# Altium PCB uku20710_proc.PcbDoc (part 2 of 3)
Units mm, origin at the board's own origin, x right, y up, seen from the top; angles counter-clockwise.
Board outline 354.7 x 156.7 mm, 4 copper layers (Top Layer, MidLayer1, MidLayer2, Bottom Layer); 269 components, 535 nets, 989 pads, 584 vias.
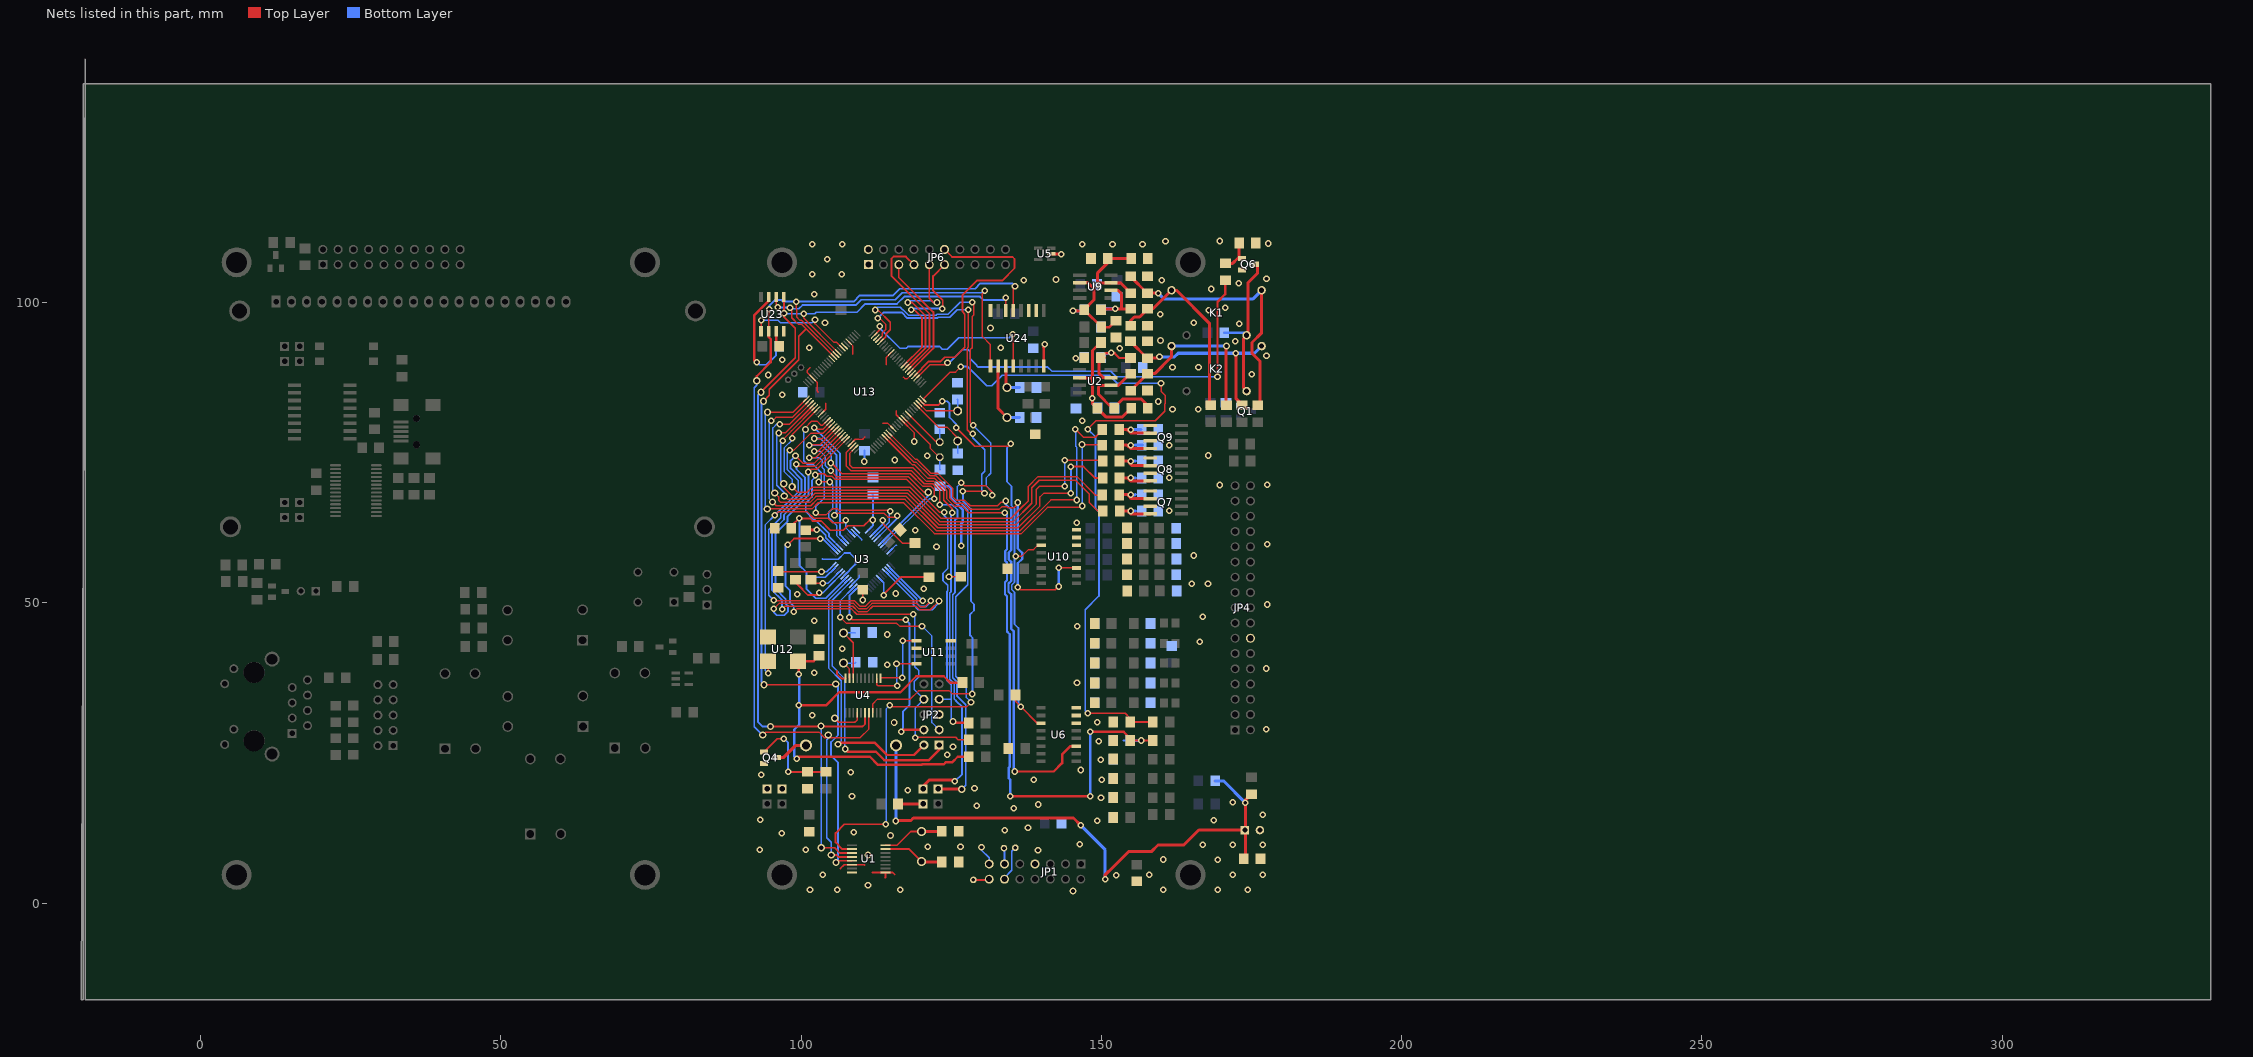
[diagram p2: the nets of this part, all layers, seen from the top]

## Via types
v1: diameter 1.1, hole 0.6, Top Layer to Bottom Layer, 508 vias
v2: diameter 1.2, hole 0.7, Top Layer to Bottom Layer, 56 vias
v3: diameter 1.5, hole 1, Top Layer to Bottom Layer, 16 vias
v4: diameter 1.27, hole 0.711, Top Layer to Bottom Layer, 2 vias
v5: diameter 1.2, hole 0.6, Top Layer to Bottom Layer, 1 vias
v6: diameter 1.1, hole 0.7, Top Layer to Bottom Layer, 1 vias

## Nets (pads, with @x,y where several pads share a name; then routed paths per layer and width w, separated by ;. In a path a pad name is that pad's centre, name@x,y a point inside that pad or via, vN(x,y) a via of type N, cw(c..) or ccw(c..) an arc to the next point about the centre after c; other vN are vias at no path point) (continued)
GND: C1.2 C2.1 C3.2 C4.2 C5.2 C6.2 C7.2 C8.2 C9.2 C10.2 C12.1 C13.2 C14.1 C15.1 C16.1 C17.1 C18.1 C19.1 C20.1 C21.2 C22.1 C23.2 C24.2 C25.1 C26.2 C28.2 C30.2 C31.2 C32.2 C33.2 C34.2 C35.1 C36.1 C37.2 C38.2 C39.2 C40.2 C50.1 C51.1 C52.1 C53.1 C54.1 C55.1 C56.1 C57.1 C58.1 C60.1 C62.1 C63.1 C64.1 C65.1 C66.2 C200.1 C201.1 D3.1 D4.1 D6.1 D7.1 D8.1 D9.1 D10.1 D11.1 D12.1 D13.1 JP1.7 JP2.5 JP4.14 JP6.1 JP6.2 Q1.2 Q4.2 Q6.2 Q7.1 Q7.3 Q8.1 Q8.3 Q9.1 Q9.3 R1.1 R18.2 R19.1 R23.1 R24.2 R26.2 R28.2 R32.2 R34.1 R35.2 R39.1 R40.2 R48.1 R55.1 R59.1 R69.1 R70.1 R74.1 R76.1 R77.1 R78.1 R81.1 R82.1 R117.1 R127.1 U1.6 U1.8 U1.9 U3.15 U3.19 U3.35 U3.36 U3.47 U4.10 U5.2 U6.6 U6.7 U6.8 U10.6 U10.7 U10.8 U11.2 U11.8 U12.2 U13.11 U13.15 U13.31 U13.41 U13.55 U13.72 U13.83 U13.97 U23.4 U24.8 U24.10 U24.11 U24.16 X9.1 X11.1 | length 72.4
  Top Layer w0.25: 101.476,89.15 101.025,88.7 101.025,88.335 102.649,86.712 102.649,85.25 102.849,85.05 ; U13.83@103.327,81.438 104.099,82.21 104.099,83.25 ; U13.55@107.923,93.458 108.55,92.831 108.55,91.372 ; U13.97@108.276,76.488 109.007,77.218 110.25,77.218 110.624,77.592 110.624,77.618 ; C30.2@110.246,52.148 110.279,52.115 v1@110.279,50.448 ; 113.624,79.919 114.391,79.919 U13.11@115.347,78.963 ; 114.201,89.621 114.201,90.898 U13.41@114.994,91.691 ; 115.824,81.969 115.824,81.315 116.616,80.522 U13.15@116.762,80.377 118.853,78.286 118.853,77.518 ; 117.024,87.572 117.324,87.272 117.646,87.272 U13.31@118.529,88.155
  Top Layer w0.3: 105.972,38.659 105.972,38.108 106.671,37.409 U4.10@107.377,37.409 ; 106.527,5.75 107.154,6.377 110.501,6.377 110.528,6.35 ; 111.902,5.077 115.252,5.077 115.579,4.75 ; 113.971,4.2 114.027,4.255 U1.9@114.027,5.077
  Top Layer w0.4: C30.2@110.227,51.547 110.246,51.565 C30.2@110.246,52.148 ; 140.308,92.522 140.358,92.522 140.419,92.461 U24.8@140.419,89.425 U24.8@140.419,89.371
  Top Layer w0.5: U24.10@139.149,98.675 U24.10@139.174,98.7 ; U5.2@141.399,108.1 U5.2@141.633,108.1 v1@142.824,108.1
  Bottom Layer w0.25: 103.628,57.215 106.193,57.215 ; U3.19@107.085,54.447 U3.19@107.142,54.505 ; U3.15@108.499,53.033 109.677,54.211 109.677,54.548 ; U3.35@108.852,61.766 110.102,60.516 110.102,60.449 ; U3.47@114.757,58.584 115.772,59.599 115.879,59.599
  Bottom Layer w0.3: 103.576,57.285 103.612,57.249 ; 106.176,57.249 107.213,58.285 108.115,58.285 109.027,57.373 109.027,56.39 U3.19@107.142,54.505 ; v1@110.557,73.574 C32.2@110.557,75.331
  Bottom Layer w0.4: C35.1@123.118,69.388 124.7,69.388 124.971,69.116 124.971,67.426 126.882,65.515 126.882,63.415 126.682,63.215 v1(126.682,59.464)
  other v1: 145.271,1.999 101.472,2.199 106.027,2.199 116.529,2.199 160.29,2.199 169.371,2.199 174.344,2.199 111.128,2.95 152.438,4.65 103.571,4.7 157.971,4.7 171.843,4.7 176.845,4.7 169.343,7.201 160.271,7.251 111.128,8.001 139.435,8.801 93.123,8.901 100.775,8.901 121.071,9.401 126.532,9.401 166.842,9.701 171.843,9.701 176.871,9.701 146.371,9.801 114.879,11.25 96.774,11.65 108.727,11.752 133.871,12.102 137.771,12.502 149.338,13.702 168.693,13.75 93.173,13.85 176.845,14.703 135.434,15.75 129.271,16.203 139.471,16.403 171.843,16.803 149.938,17.503 108.472,17.803 117.771,18.804 128.871,19.104 150.038,20.504 138.735,20.55 93.374,21.35 108.272,21.754 146.587,22.15 149.888,23.85 124.331,24.705 125.282,26.007 149.588,26.95 177.471,28.956 149.338,30.106 101.826,31.25 145.937,36.65 102.172,38.358 177.445,39.05 114.329,39.709 106.827,42.35 166.392,43.51 114.329,44.71 145.971,46.11 102.172,47.011 166.842,47.661 177.595,49.711 110.252,50.463 99.325,51.45 115.729,51.55 120.43,52.312 165.042,53.15 167.742,53.15 165.392,57.863 122.531,59.314 177.595,59.714 118.98,62.05 145.887,63.315 161.271,65.315 169.693,69.616 177.595,69.65 161.271,70.817 110.502,73.518 115.571,73.767 120.971,74.468 167.771,74.518 161.271,76.218 118.83,76.85 146.837,80.319 161.841,82.22 166.142,82.22 159.49,83.52 96.824,84.65 94.524,87.921 175.044,88.05 161.841,89.221 166.171,89.221 96.824,90.45 145.737,90.75 177.495,91.15 153.039,92.372 101.326,92.45 133.234,92.45 140.585,93.05 172.293,93.522 159.84,93.672 131.533,95.75 172.944,96.45 103.972,96.623 165.371,96.623 159.771,98.074 167.842,98.724 170.643,99.124 102.172,101.374 168.292,102.25 172.844,103.175 137.035,103.675 160.071,103.725 142.436,103.825 177.495,103.975 101.876,104.725 106.772,104.725 104.326,107.226 143.336,108.05 106.827,109.676 146.837,109.676 151.838,109.676 101.826,109.726 156.84,109.726 177.771,109.826 160.671,110.227 169.693,110.25
  other v6: 115.479,30.058
GND_P: 
NetA1_1: A1.1 Q4.3 | length 5.6
  Top Layer w0.5: Q4.3@96.022,24.203 97.023,24.203 99.025,26.205 A1.1@100.775,26.205
NetA1_2: A1.2 C3.1 R16.1 R19.2 R103.1 | length 99.6
  Top Layer w0.5: v1@115.779,13.752 118.28,13.752 118.68,14.152 145.337,14.152 v1(146.537,12.952) ; v1(150.638,3.95) 150.638,4.7 151.238,5.3 ; 151.25,5.289 154.511,8.55 158.313,8.55 159.414,9.651 163.714,9.651 166.213,12.15 173.886,12.15 C3.1@173.974,12.15 ; R19.2@173.674,7.4 173.974,7.7 173.974,12.142 C3.1@173.974,12.15 ; R16.1@174.981,18.138 173.974,17.131 C3.1@173.974,12.15
  Bottom Layer w0.5: v1@115.779,13.752 115.797,13.771 A1.2@115.797,26.244 ; v1(146.537,12.952) 150.638,8.851 v1(150.638,3.95) ; R103.1@168.955,20.349 170.327,20.349 v1(173.971,16.704)
  other v1: 115.779,13.652
NetBT2_1: 
NetBT2_2: 
NetBT700_1: 
NetC2_1: 
NetC2_2: C2.2 U4.8 Y5.2 | length 10.2
  Top Layer w0.25: Y5.2@107.051,44.968 108.677,43.342 U4.8@108.677,37.409
  Bottom Layer w0.25: Y5.2@107.051,44.968 108.958,44.968 C2.2@109.001,45.011
NetC11_1: C11.1 C15.2 R57.2 R62.1 U9.6 | length 16.8
  Top Layer w0.4: R62.1@149.987,95.907 150.018,95.907 150.031,95.907 151.345,95.907 C15.2@152.362,96.924
  Top Layer w0.5: 145.874,98.65 145.874,98.625 145.874,98.6 146.93,98.6 R57.2@147.062,98.732 ; U9.6@146.374,103.3 146.385,103.3 147.774,103.3 148.774,102.3 148.774,100.444 R57.2@147.137,98.807 R57.2@147.062,98.732 ; R62.1@150.124,96 150.031,95.907 150.024,95.9 150.018,95.907 150.002,95.922 147.192,98.732 147.137,98.732 R57.2@147.062,98.732 ; R62.1@150.468,95.907 R62.1@150.487,95.907
  Bottom Layer w0.5: 145.874,98.6 147.074,98.6 C11.1@147.174,98.7
  other v1: 145.261,98.625
NetC11_2: C11.2 R57.1 R61.2 U9.2 | length 11
  Top Layer w0.5: R57.1@150.47,98.64 150.78,98.95 v1(152.274,98.95) 153.374,98.95 ; U9.2@151.585,102.018 152.807,102.018 153.374,101.45 153.374,98.95 ; R61.2@154.881,98.938 154.874,98.95 153.374,98.95
  Bottom Layer w0.6: C11.2@150.477,98.647 150.78,98.95 v1(152.274,98.95) v1@152.324,98.95
NetC12_2: C12.2 K1.3 R60.1 R61.1 | length 32
  Top Layer w0.5: R61.1@154.881,96.138 154.881,97.007 155.474,97.6 156.374,97.6 157.699,98.925 157.774,99 158.64,99 K1.3@161.68,102.04 162.485,102.04 167.968,96.557 R60.1@167.968,82.862
NetC14_2: C14.2 K1.1 R64.1 R65.1 | length 44.4
  Top Layer w0.5: R65.1@154.874,104.35 154.874,104.3 157.574,101.6 157.678,101.6 159.424,101.6 v1(159.474,101.55) ; R64.1@176.374,82.85 176.374,90.25 175.074,91.55 175.074,93.35 176.68,94.956 K1.1@176.68,102.04
  Bottom Layer w0.5: v1(159.474,101.55) 160.474,100.55 175.19,100.55 K1.1@176.68,102.04
NetC21_1: C21.1 C34.1 U3.18 U3.23 U3.37 | length 48.4
  Top Layer w0.3: C21.1@98.376,62.351 C21.1@98.375,62.401 98.376,62.801 v1(99.676,64.101) ; v1@99.702,63.685 99.897,63.88 100.052,64.035 101.487,64.035 101.891,63.631 103.306,63.631 104.852,62.085 107.002,62.085 107.752,62.835 110.452,62.835 111.402,63.785 v1(111.952,63.785)
  Bottom Layer w0.3: v1@99.702,63.685 99.702,56.235 100.902,55.035 100.902,54.235 ; U3.23@105.67,55.861 104.044,54.235 100.902,54.235 ; U3.18@107.438,54.094 104.08,50.735 102.402,50.735 100.902,52.235 100.902,54.235 ; U3.37@111.221,62.119 111.952,62.85 v1(111.952,63.785) 111.952,67.985 C34.1@111.902,68.035
NetC22_1: 
NetC22_2: C22.2 U4.9 Y5.1 | length 5.1
  Top Layer w0.25: Y5.1@107.051,39.968 108.027,38.992 U4.9@108.027,37.409
  Bottom Layer w0.25: Y5.1@107.051,39.968 108.979,39.968 C22.2@109.114,40.103
NetC23_1: C23.1 R65.2 R69.2 U9.3 | length 14.7
  Top Layer w0.5: R65.2@154.874,101.55 154.874,101.6 153.187,103.288 U9.3@151.585,103.288 149.587,103.288 149.374,103.5 149.374,104.95 151.059,106.634 C23.1@151.059,107.324 151.083,107.3 154.874,107.3 R69.2@154.937,107.307
NetC33_1: C33.1 R98.1 R99.1 U12.4 | length 80.1
  Top Layer w0.4: v1(99.275,24.005) 99.619,24.348 111.435,24.348 112.727,23.056 120.08,23.056 120.13,23.106 123.781,23.106 124.131,23.456 125.189,23.456 126.082,24.348 R99.1@127.92,24.348 ; v1(99.625,32.907) 104.126,32.907 106.327,35.108 116.529,35.108 119.172,37.75 123.741,37.75 124.781,36.709 125.632,36.709 ; v1(99.625,38.108) 99.625,40.259 102.076,40.259 C33.1@102.976,41.159 ; 125.632,36.701 R98.1@126.87,36.701
  Bottom Layer w0.4: v1(99.275,24.005) 98.825,24.455 98.825,28.856 99.675,29.706 99.675,38.058 v1(99.625,38.108)
NetC35_2: C35.2 U13.16 Y1.2 | length 11.1
  Top Layer w0.25: U13.16@117.115,80.731 121.524,76.321 121.524,75.7 122.976,74.249 123.074,74.249 Y1.2@123.079,74.249
  Bottom Layer w0.3: Y1.2@123.079,74.249 123.079,74.247 123.079,72.226 C35.2@123.118,72.188 C35.2@123.124,72.194
NetC36_2: C36.2 U13.18 Y1.1 | length 9.3
  Top Layer w0.25: U13.18@117.822,81.438 122.511,76.749 123.074,76.749 Y1.1@123.079,76.749
  Bottom Layer w0.3: Y1.1@123.079,76.749 123.079,78.86 C36.2@123.081,78.862
NetC45_1: 
NetC45_2: 
NetC46_1: 
NetC46_2: 
NetC47_2: 
NetC48_1: 
NetC48_2: 
NetC49_1: 
NetC50_2: C50.2 U24.2 Y4.1 | length 11.3
  Top Layer w0.5: U24.2@132.799,89.425 132.799,82.333 Y4.1@134.274,80.858
  Bottom Layer w0.5: Y4.1@134.274,80.858 136.367,80.858 C50.2@136.387,80.843
NetC51_2: C51.2 U13.23 Y3.1 | length 8.9
  Top Layer w0.25: U13.23@119.59,83.205 120.853,81.942 Y3.1@126.075,81.942
  Bottom Layer w0.3: C51.2@126.021,83.847 126.075,83.794 Y3.1@126.075,81.942
NetC52_2: C52.2 U13.22 Y3.2 | length 11.6
  Top Layer w0.25: U13.22@119.236,82.852 122.838,79.25 124.274,79.25 126.075,77.45 Y3.2@126.075,76.942
  Bottom Layer w0.3: C52.2@126.075,74.9 Y3.2@126.075,76.942
NetC53_2: C53.2 U24.3 Y4.2 | length 5.8
  Top Layer w0.5: U24.3@134.069,89.425 134.069,86.063 Y4.2@134.274,85.858
  Bottom Layer w0.5: Y4.2@134.274,85.858 136.372,85.858 C53.2@136.387,85.843
NetC61_1: C61.1 C64.2 R12.2 R122.1 U2.6 | length 22.8
  Top Layer w0.5: U2.6@146.374,87.45 148.474,87.45 ; C61.1@149.224,82.45 148.474,83.2 v1(148.474,84.05) 148.474,87.45 ; C61.1@149.324,82.4 150.824,80.9 153.43,80.9 R12.2@154.937,82.407 ; R122.1@149.874,93.35 148.524,92 148.524,89.65 148.474,89.6 148.474,87.45
  Bottom Layer w0.5: v1(148.474,84.05) 148.474,83.2 149.224,82.45 149.372,82.45 C64.2@149.374,82.45
NetC61_2: C61.2 R12.1 R121.2 U2.2 | length 18.3
  Top Layer w0.5: R121.2@154.881,88.138 154.762,88.138 152.839,86.215 U2.2@151.574,86.215 149.739,86.215 149.474,85.95 149.474,84.75 151.774,82.45 152.024,82.45 152.074,82.4 152.074,82.403 152.074,82.45 152.077,82.453 153.524,83.9 156.674,83.9 157.674,82.9 157.674,82.407 R12.1@157.674,82.4
NetC62_2: C62.2 K2.3 R13.1 R121.1 | length 30
  Top Layer w0.5: R121.1@154.881,85.338 154.874,85.4 154.881,85.4 154.924,85.4 157.674,88.15 158.874,88.15 161.68,90.956 K2.3@161.68,92.74 ; R13.1@170.768,82.862 170.768,92.693 v1(170.824,92.75)
  Bottom Layer w0.5: K2.3@161.68,92.74 170.814,92.74 v1(170.824,92.75)
NetC63_2: C63.2 K2.1 R124.1 R125.1 | length 33
  Top Layer w0.5: R125.1@154.868,93.562 154.874,93.55 154.874,93.45 157.574,90.75 157.678,90.75 159.474,90.75 v1(159.674,90.95) ; v1(172.374,91.55) 172.374,84.056 R124.1@173.568,82.862
  Bottom Layer w0.5: v1(159.674,90.95) 162.174,90.95 162.774,91.55 v1(172.374,91.55) 175.49,91.55 K2.1@176.68,92.74
NetC66_1: C66.1 R125.2 R127.2 U2.3 | length 12.8
  Top Layer w0.4: R127.2@149.912,90.793 150.642,91.523 151.662,91.523 152.212,91.523 152.973,90.762 R125.2@154.868,90.762
  Top Layer w0.5: R127.2@150.474,90.85 150.474,90.8 150.19,90.516 149.574,89.9 149.574,88.2 150.289,87.485 U2.3@151.574,87.485
  Bottom Layer w0.5: C66.1@149.972,90.853 150.641,91.523 v1@151.612,91.523
  other v1: 151.662,91.623
NetC200_2: C200.2 U1.16 Y2.2 | length 10.4
  Top Layer w0.3: U1.16@114.027,9.627 115.955,9.627 118.237,11.909 Y2.2@120.054,11.909
  Top Layer w0.5: Y2.2@120.054,11.909 123.368,11.909 C200.2@123.418,11.959
NetC201_2: C201.2 U1.15 Y2.1 | length 10.1
  Top Layer w0.3: U1.15@114.027,8.977 117.987,8.977 120.03,6.933 Y2.1@120.013,6.933
  Top Layer w0.5: Y2.1@120.162,6.802 C201.2@123.405,6.802
NetC302_1: 
NetC302_2: 
NetC500_2: 
NetC502_1: 
NetC502_2: 
NetC505_1: 
NetC505_2: 
NetC508_1: 
NetC510_1: 
NetC511_1: 
NetC511_2: 
NetC512_2: 
NetC513_2: 
NetC514_1: 
NetC516_1: 
NetC516_2: 
NetC517_1: 
NetC600_1: 
NetC600_2: 
NetC700_1: 
NetC700_2: 
NetC701_1: 
NetC702_1: 
NetC704_2: 
NetC705_2: 
NetC706_1: 
NetC707_1: 
NetC707_2: 
NetC709_1: 
NetC709_2: 
NetC710_1: 
NetC713_1: 
NetC714_1: 
NetC715_1: 
NetD1_2: D1.2 X18.1 | length 4.3
  Top Layer w0.5: D1.2@116.079,16.553 116.093,16.553 116.145,16.5 X18.1@120.322,16.5
NetD3_1: 
NetD3_2: 
NetD5_1: D5.1 K1.5 K2.5 Q6.3 | length 26.3
  Top Layer w0.5: K2.5@174.18,85.24 173.674,85.745 173.674,94.034 K1.5@174.18,94.54 174.374,94.734 174.374,103.25 176.024,104.9 176.024,106.12 Q6.3@175.768,106.377
  Bottom Layer w0.4: D5.1@170.474,94.95 173.77,94.95 K1.5@174.18,94.54
NetD20_2: 
NetD500_1: 
NetD500_2: 
NetD501_1: 
NetD503_1: 
NetD505_1: 
NetD505_2: 
NetD506_1: 
NetD700_1: 
NetD701_1: 
NetD702_1: 
NetD703_2: 
NetD704_1: 
NetD705_1: 
NetD706_1: 
NetDS1_1: 
NetDS1_2: 
NetFU500_1: 
NetFU700_1: 
NetFU700_2: 
NetJ1_2: 
NetJ1_3: 
NetJ1_4: 
NetJ1_7: 
NetJ301_1: 
NetJ301_2: 
NetJ301_3: 
NetJ301_6: 
NetJ301_10: 
NetJ301_11: 
NetJ600_1: 
NetJP1_9: 
NetJP1_10: 
NetJP2_1: JP2.1 U3.16 | length 47.8
  Top Layer w0.4: v1(107.327,25.65) 107.771,25.206 112.428,25.206 113.829,23.806 121.281,23.806 122.981,25.506 JP2.1@122.981,26.307
  Bottom Layer w0.25: v1(107.327,25.65) 107.227,25.75 107.227,37.409 105.176,39.46 105.176,50.418 U3.16@108.145,53.386
NetJP2_2: JP2.2 U3.17 | length 45.6
  Top Layer w0.4: v1(106.127,26.45) 106.384,26.707 112.228,26.707 114.279,24.656 118.791,24.656 JP2.2@120.441,26.307
  Bottom Layer w0.25: v1(106.127,26.45) 106.677,27 106.677,37.009 104.626,39.06 104.626,50.575 U3.17@107.792,53.74
NetJP2_3: JP2.3 U3.14 | length 38.8
  Top Layer w0.25: v1(106.477,47.612) 107.527,46.562 115.929,46.562 116.379,46.112 v1(120.13,46.112)
  Bottom Layer w0.25: v1(106.477,47.612) 106.477,50.304 U3.14@108.852,52.679 ; v1(120.13,46.112) 121.781,44.461 121.781,30.047 JP2.3@122.981,28.847
NetJP2_4: JP2.4 U3.13 | length 38.2
  Top Layer w0.3: v1(108.027,47.612) 108.477,47.162 v1(117.43,47.162)
  Top Layer w0.4: v1(116.671,28.507) 117.011,28.847 JP2.4@120.441,28.847
  Bottom Layer w0.3: v1(108.027,47.612) 108.027,51.147 U3.13@109.206,52.326 ; v1(116.671,28.507) 116.971,28.807 116.971,31.908 118.03,32.966 118.03,46.562 v1(117.43,47.162)
NetJP2_7: JP2.7 R113.1 U3.28 | length 80.3
  Top Layer w0.25: v1@102.5,71.068 102.9,71.468 103.85,71.468 104.25,71.068 105.15,71.068 105.668,70.55 117.574,70.55 123.074,65.05 v1(123.824,65.05)
  Top Layer w0.4: v2@125.005,30.007 125.012,30.001 R113.1@127.894,30.001
  Bottom Layer w0.3: v1@102.5,71.068 101.8,70.368 101.8,67.617 100.749,66.567 100.749,65.216 102.13,63.835 102.302,63.835 104.652,61.485 104.652,61.016 104.96,60.709 U3.28@106.378,59.291 ; JP2.7@122.981,33.927 124.987,33.927 125.005,33.909 ; v1(123.824,65.05) 123.824,64.5 124.424,63.9 124.424,55.7 123.624,54.9 123.624,53.7 124.424,52.9 124.424,51.984 124.272,51.831 124.272,37.093 125.005,36.359 v2@125.005,30.007
  other v1: 102.35,71.268
  other v2: 125.282,30.208
NetJP2_8: JP2.8 R112.1 U3.26 | length 72.9
  Top Layer w0.25: v1(98.776,48.498) 99.241,48.962 108.401,48.962 109.264,48.1 118.642,48.1 v1(118.68,48.062) ; v1(119.03,27.55) 119.087,27.607 125.732,27.607 126.139,27.2 R112.1@127.894,27.2
  Top Layer w0.3: v1(97.776,59.65) 98.811,60.685 v1(103.152,60.685)
  Bottom Layer w0.25: v1(118.68,48.062) 118.93,47.812 118.93,39.351 119.571,38.71 119.571,37.641 118.83,36.9 118.83,35.538 JP2.8@120.441,33.927 119.03,32.516 v1(119.03,27.55)
  Bottom Layer w0.3: v1@97.376,59.65 97.376,52.799 98.126,52.048 98.126,50.098 98.776,49.448 v1(98.776,48.498) ; v1(103.152,60.685) 103.569,60.685 U3.26@105.67,58.584
NetJP3_3: 
NetJP3_3: 
NetJP5_5: 
NetJP5_6: 
NetJP5_7: 
NetJP5_9: 
NetJP5_10: 
NetJP5_11: 
NetJP5_12: 
NetJP9_1: 
NetJP10_1: 
NetJP10_2: 
NetJP10_3: 
NetJP10_4: 
NetJP10_5: 
NetJP10_6: 
NetQ1_1: Q1.1 R1.2 R84.2 | length 5
  Bottom Layer w0.3: R84.2@168.113,80.468 172.365,80.468 Q1.1@172.868,80.97
NetQ1_1: 
NetQ1_2: 
NetQ4_1: Q4.1 R22.2 R23.2 | length 16.4
  Top Layer w0.3: Q4.1@93.774,25.105 96.024,27.356 v1(97.124,27.356) ; v1(97.825,21.854) 97.825,21.804 97.862,21.842 R22.2@104.133,21.842
  Bottom Layer w0.3: v1(97.124,27.356) 97.825,26.656 v1(97.825,21.854)
NetQ5_2: 
NetQ6_1: Q6.1 R72.2 R74.2 | length 5.4
  Top Layer w0.5: R72.2@170.667,106.526 171.867,106.526 172.666,107.325 Q6.1@173.422,107.325 ; Q6.1@172.924,107.583 172.924,109.884 R74.2@172.924,109.928
NetQ7_2: Q7.2 R31.2 R34.2 | length 6.2
  Top Layer w0.5: R31.2@153.012,67.993 153.019,68 154.324,68 154.499,67.825 154.549,67.775 154.599,67.725 154.984,67.34 Q7.2@158.136,67.34
  Bottom Layer w0.5: v1@154.874,67.95 155.624,67.95 155.637,67.993
  other v1: 154.874,68
NetQ7_4: Q7.4 R38.2 R39.2 | length 6.1
  Top Layer w0.5: R38.2@153.024,65.3 154.324,65.3 154.513,65.111 154.563,65.061 154.613,65.011 154.824,64.8 154.874,64.8 Q7.4@158.136,64.8
  Bottom Layer w0.5: v1(154.874,65.272) 155.547,65.272 155.574,65.3 155.637,65.293
NetQ8_2: Q8.2 R30.2 R77.2 | length 6.2
  Top Layer w0.5: R30.2@153.012,73.593 154.318,73.593 154.324,73.6 154.503,73.422 154.603,73.322 155.089,72.835 Q8.2@158.124,72.835
  Bottom Layer w0.5: v1(154.874,73.593) 155.637,73.593
NetQ8_4: Q8.4 R37.2 R78.2 | length 6.1
  Top Layer w0.5: R37.2@153.012,70.793 154.324,70.793 154.499,70.618 154.549,70.568 154.599,70.518 154.823,70.295 154.874,70.295 Q8.4@158.124,70.295
  Bottom Layer w0.5: v1(154.874,70.793) 155.637,70.793
NetQ9_2: Q9.2 R79.2 R81.2 | length 7.2
  Top Layer w0.5: R79.2@152.962,78.843 154.274,78.843 ; 154.274,78.8 154.274,78.843 ; Q9.2@158.124,78.235 154.939,78.235 154.624,78.55 154.574,78.6 154.524,78.65 154.331,78.843 154.274,78.843
  Bottom Layer w0.5: v1@154.874,78.843 R81.2@156.587,78.843
  other v1: 154.874,78.8
NetQ9_4: Q9.4 R80.2 R82.2 | length 6.7
  Top Layer w0.5: R80.2@152.962,76.243 154.268,76.243 154.274,76.25 154.474,76.05 154.524,76 154.574,75.95 154.829,75.695 154.874,75.695 Q9.4@158.124,75.695
  Bottom Layer w0.5: 155.587,76.243 R82.2@156.687,76.243 R82.2@156.874,76.243
  other v1: 154.874,76.25
NetQ10_1: 
NetQ10_3: 
NetQ10_3: 
NetQ11_1: 
NetQ11_1: 
NetQ11_3: 
NetQ500_1: 
NetQ501_1: 
NetQ600_1: 
NetQ600_3: 
NetQ700_1: 
NetQ700_3: 
NetR3_1: 
NetR3_2: 
NetR3_2: 
NetR3_2: 
NetR3_2: 
NetR3_2: 
NetR3_2: 
NetR3_2: 
NetR4_1: 
NetR4_2: 
NetR5_1: 
NetR5_2: 
NetR6_1: 
NetR6_2: 
NetR7_1: 
NetR7_2: 
NetR7_2: 
NetR8_1: 
NetR8_1: 
NetR8_2: 
NetR8_2: 
NetR20_1: R20.1 U3.7 | length 12.1
  Top Layer w0.3: v1(113.728,51.247) 113.728,51.412 114.677,52.36 115.052,52.735 116.59,54.273 R20.1@121.309,54.273
  Bottom Layer w0.3: U3.7@112.989,54.094 113.737,53.345 113.737,51.406 113.728,51.397 v1(113.728,51.247)
NetR22_2: 
NetR22_2: 
NetR22_2: 
NetR22_2: 
NetR22_2: 
NetR22_2: 
NetR22_2: 
NetR22_2: 
NetR22_2: 
NetR25_1: 
NetR30_2: 
NetR38_1: 
NetR43_1: 
NetR43_2: 
NetR43_2: 
NetR44_2: 
NetR44_2: 
NetR45_2: 
NetR52_1: 
NetR53_1: 
NetR57_1: 
NetR60_1: 
NetR69_2: 
NetR83_1: 
NetR90_2: 
NetR91_1: 
NetR93_1: 
NetR95_1: R95.1 U23.3 | length 2.4
  Top Layer w0.4: R95.1@95.824,92.85 95.859,92.885 U23.3@95.859,95.2
NetR96_2: R96.2 U23.7 | length 17.7
  Top Layer w0.4: v1(92.574,90.05) 92.174,90.45 92.174,97.85 94.589,100.265 U23.7@94.589,100.9
  Bottom Layer w0.3: v1(92.574,90.05) 93.002,89.622 94.197,89.622 95.824,91.25 95.824,92.707 R96.2@95.824,92.8
NetR114_1: R114.1 U3.27 | length 6
  Top Layer w0.5: R114.1@101.652,62.185 101.702,62.135 102.552,62.135 v1(102.602,62.185)
  Bottom Layer w0.3: v1(102.602,62.185) 103.152,62.185 104.102,61.235 104.102,60.859 U3.27@106.024,58.937
NetR115_1: R115.1 U3.21 | length 5.7
  Top Layer w0.3: R115.1@101.659,53.823 102.233,53.249 v1(103.577,53.249)
  Bottom Layer w0.25: v1(103.577,53.249) 104.472,53.249 U3.21@106.378,55.154
NetR116_1: R116.1 U3.20 | length 12.7
  Top Layer w0.25: R116.1@99.059,53.823 99.059,53.479 100.252,52.285
  Top Layer w0.3: R116.1@99.059,53.823 99.059,53.479 99.059,53.366 101.126,51.298 103.027,51.298 103.227,51.298 v1@103.327,51.398
  Bottom Layer w0.25: v1(103.027,51.698) 103.677,51.698 104.666,52.687 104.666,52.735 U3.20@106.731,54.801
NetR117_2: R117.2 U3.24 | length 9.6
  Top Layer w0.25: R117.2@96.196,55.148 v1(103.39,55.148) v1@103.402,55.135
  Bottom Layer w0.25: v1(103.39,55.148) 104.25,55.148 U3.24@105.317,56.215
NetR120_1: R120.1 U3.39 | length 10.6
  Top Layer w0.25: v1@113.702,63.885 113.702,63.085 116.84,59.948 R120.1@118.946,59.948
  Bottom Layer w0.3: U3.39@111.928,61.412 113.702,63.186 v1@113.702,63.885
  other v1: 113.603,63.766
NetR305_2: 
NetR306_2: 
NetR504_1: 
NetR505_2: 
NetR505_2: 
NetR510_1: 
NetR600_1: 
NetR600_2: 
NetR603_1: 
NetR603_2: 
NetR605_2: 
NetR702_2: 
NetR704_2: 
NetR705_1: 
NetS2_1: 
NetU1_1: 
NetU1_4: 
NetU1_5: 
NetU4_1: U4.1 U11.1 | length 12.1
  Top Layer w0.25: U4.1@113.227,37.409 113.328,37.509 v1(116.853,37.509) ; v1(116.903,43.661) 116.908,43.665 U11.1@119.205,43.665
  Bottom Layer w0.25: v1(116.853,37.509) 116.903,37.559 v1(116.903,43.661)
NetU4_2: U4.2 U11.4 | length 11.6
  Top Layer w0.25: U4.2@112.577,37.409 112.577,36.36 112.778,36.158 v1(115.979,36.158) ; v1@115.879,39.855 U11.4@119.205,39.855
  Bottom Layer w0.25: v1(115.879,39.859) 115.879,36.258 v1(115.979,36.158)
NetU5_1: 
NetU8_3: 
NetU8_7: 
NetU8_8: 
NetU11_5: 
NetU14_3: 
NetU14_4: 
NetU14_5: 
NetU14_6: 
NetU14_12: 
NetU14_13: 
NetU14_14: 
NetU15_3: 
NetU15_3: 
NetU15_3: 
NetU15_3: 
NetU15_4: 
NetU15_5: 
NetU15_5: 
NetU15_5: 
NetU15_5: 
NetU15_5: 
NetU15_5: 
NetU15_7: 
NetU15_7: 
NetU15_9: 
NetU15_10: 
NetU15_15: 
NetU16_3: 
NetU16_4: 
NetU16_6: 
NetU19_4: 
NetU21_1: 
NetU21_2: 
NetU503_4: 
NetU600_3: 
NetU700_4: 
NetX1_1: 
NetX2_1: 
NetX3_1: 
NetX4_1: 
NetX13_1: 
NetX15_1: 
NetX16_1: X16.1 X22.1 | length 3.3
  Bottom Layer w0.3: X22.1@130.033,9.301 130.033,8.801 131.321,7.513 X16.1@131.321,6.5
NetX21_1: X21.1 X23.1 | length 2.7
  Bottom Layer w0.3: X23.1@133.771,9.151 133.861,9.062 X21.1@133.861,6.5
NetX23_1: 
NetX24_1: X24.1 X26.1 | length 6
  Bottom Layer w0.3: X24.1@133.861,3.96 133.861,4.227 135.071,5.438 135.071,8.588 X26.1@135.684,9.201
NetX25_1: X25.1 X27.1 | length 2.7
  Top Layer w0.3: X27.1@128.682,3.85 131.211,3.85 X25.1@131.321,3.96
NetX32_1: 
NetX33_1: 
OFF1: 
OFF2: 
P0_0: U1.2 U13.46 | length 153.5
  Top Layer w0.25: v1@112.324,98.6 112.274,98.65 112.274,98.7 112.324,98.65 112.874,98.65 114.824,96.7 114.824,95.45 114.074,94.7 114.074,94.307 U13.46@113.226,93.459 ; v1@114.029,13.102 v1(114.079,13.102) ; v1(114.779,32.957) 115.078,32.658 127.533,32.658 v1(128.282,33.407) ; v1(126.682,70.016) 127.232,69.466 130.783,69.466 131.833,68.416 v1(131.833,67.916) ; v1(128.474,100.05) 128.774,99.75 128.774,97.95 128.474,97.65 128.474,92.45 128.174,92.15 128.174,80 v1(128.624,79.55)
  Top Layer w0.3: U1.2@108.477,8.977 106.851,8.977 105.727,10.101 105.727,11.652 107.177,13.102 v1@114.029,13.102
  Bottom Layer w0.25: v1(114.079,13.102) 114.129,13.152 114.129,32.307 v1(114.779,32.957) ; v1(126.682,70.016) 126.032,69.366 126.032,67.166 127.732,65.465 127.732,53.012 125.732,51.012 125.732,37.758 127.532,35.958 127.532,34.207 128.182,33.557 v1@128.182,33.357 ; v1@128.474,100 v1(128.474,100.05) ; v1(128.624,79.55) 131.574,76.6 131.574,71.55 130.783,70.759 130.783,69.516 131.833,68.466 v1(131.833,67.916)
  Bottom Layer w0.3: v1(112.324,98.75) 112.774,99.2 116.474,99.2 116.844,98.83 116.923,98.83 117.873,97.88 122.476,97.88 122.626,98.03 124.454,98.03 126.474,100.05 v1(128.474,100.05)
P0_1: U4.18 U13.47 | length 111.7
  Top Layer w0.25: U4.18@111.927,31.709 111.928,31.71 111.928,33.157 112.728,33.957 118.179,33.957 119.53,35.309 124.681,35.309 125.183,34.808 v1(128.482,34.808) ; v1(112.724,97.35) 112.874,97.5 112.974,97.5 114.124,96.35 114.124,95.55 113.524,94.95 113.524,94.464 U13.47@112.873,93.812 ; v1(126.932,68.566) 130.233,68.566 v1(130.533,68.266) ; v1(127.824,98.8) 127.824,92.6 127.71,92.485 127.71,92.384 127.674,92.348 127.674,78.8 128.324,78.15 v1@128.624,78.15
  Bottom Layer w0.3: v1(112.724,97.35) 113.724,98.35 116.724,98.35 117.674,97.4 122.674,97.4 122.824,97.55 124.774,97.55 126.024,98.8 v1(127.824,98.8) ; 125.174,97.95 125.224,97.95 ; v1(126.932,68.566) 126.932,66.966 128.282,65.615 128.282,50.261 128.782,49.761 128.782,48.711 128.132,48.061 128.132,44.56 128.532,44.16 128.532,34.858 v1(128.482,34.808) ; v1(128.574,78.15) 128.574,77.476 130.583,75.468 130.583,71.867 130.083,71.367 130.083,68.716 v1(130.533,68.266)
P0_2: 
P0_2: 
P0_2: 
P0_2: 
P0_2: U13.98 X19.1 | length 78.7
  Top Layer w0.25: U13.98@108.63,76.134 107.501,75.006 107.501,72.768 108.301,71.968 118.354,71.968 120.504,69.817 121.897,69.817 123.105,68.609 v1(123.105,66.317)
  Top Layer w0.5: X19.1@122.805,19.005 126.706,19.005 v2(126.756,18.955)
  Bottom Layer w0.3: v1(123.105,66.317) 125.18,66.317 126.056,65.441 126.056,64.166 125.606,63.716 125.606,51.712 125.511,51.618 125.232,51.338 125.232,37.508 125.832,36.908 ; 125.823,36.899 125.965,36.757 125.965,34.449 127.406,33.008 127.406,19.605 v2(126.756,18.955)
P0_3: 
P0_3: 
P0_3: 
P0_3: 
P0_3: 
P0_3: 
P0_3: R92.1 U13.99 X17.1 | length 79.7
  Top Layer w0.25: U13.99@108.983,75.781 108.051,74.849 108.051,72.968 108.551,72.468 118.604,72.468 120.805,70.267 122.056,70.267 123.755,68.567 123.755,67.067 125.156,65.666 v1(125.156,64.966) ; v1(124.624,54.35) 124.637,54.338 R92.1@126.562,54.337 R92.1@126.881,54.338
  Top Layer w0.5: X17.1@120.304,19.005 120.322,19.022 120.322,19.472 121.355,20.505 125.331,20.505 v1(125.582,20.254)
  Bottom Layer w0.3: v1(125.156,64.966) 124.974,64.785 124.974,51.855 124.752,51.632 124.752,37.292 125.485,36.558 125.485,33.979 125.806,33.658 ; v1(125.582,20.254) 126.805,21.477 126.805,32.657 125.854,33.607 ; 125.811,33.664 125.861,33.614
P0_4: R31.1 U13.81 | length 75.7
  Top Layer w0.25: v2(98.499,69.317) 99.399,68.417 100.949,68.417 101.75,69.217 118.154,69.217 123.321,64.05 134.894,64.05 136.575,65.731 137.811,66.967 137.811,69.369 139.459,71.018 145.911,71.018 148.985,67.943 R31.1@150.162,67.943 ; v1(98.499,77.369) 98.499,78.024 U13.81@102.619,82.145
  Bottom Layer w0.25: v2(98.499,69.317) 98.499,70.518 97.148,71.868 97.148,75.769 98.499,77.119 v1(98.499,77.369)
P0_5: R38.1 U13.80 | length 79.5
  Top Layer w0.25: v1(96.948,76.969) 96.948,77.169 97.037,77.258 97.037,77.269 98.374,78.607 U13.80@102.266,82.498 ; v2(97.098,69.817) 97.098,69.217 98.599,67.717 101.049,67.717 102.05,68.717 117.904,68.717 123.171,63.45 135.274,63.45 138.409,66.584 138.409,69.167 139.659,70.418 145.661,70.418 148.011,68.067 148.011,66.667 149.378,65.3 R38.1@150.224,65.3
  Bottom Layer w0.25: v1(96.948,76.969) 96.598,76.619 96.598,70.318 v2(97.098,69.817)
P0_6: R30.1 U13.79 | length 82.9
  Top Layer w0.25: v1(96.298,78.27) 97.365,78.27 U13.79@101.912,82.817 ; v2(97.198,67.767) 97.749,67.217 101.249,67.217 102.25,68.217 117.754,68.217 123.001,62.97 135.694,62.97 139.109,66.385 139.109,68.817 139.709,69.417 v1(143.91,69.417) ; v1(143.924,73.7) 150.105,73.7 R30.1@150.212,73.593
  Bottom Layer w0.25: v1(96.298,78.27) 95.948,77.92 95.948,69.567 97.198,68.317 v2(97.198,67.767) ; v1@143.924,69.417 v1(143.924,73.7)
  Bottom Layer w0.3: v1(143.91,69.417) v1@143.91,69.453
P0_7: R37.1 U13.78 | length 85.6
  Top Layer w0.25: v2(95.598,68.267) 96.248,67.617 96.248,67.067 96.598,66.717 101.45,66.717 102.45,67.717 117.504,67.717 122.731,62.49 136.114,62.49 139.759,66.135 139.759,67.617 140.359,68.217 v1(144.91,68.217) ; v1(96.448,79.72) 98.073,79.72 U13.78@101.559,83.205
  Top Layer w0.3: v1(144.91,72.668) 147.011,72.668 148.886,70.793 R37.1@150.212,70.793
  Bottom Layer w0.25: v2(95.598,68.267) 95.298,68.567 95.298,79.12 95.898,79.72 v1(96.448,79.72)
  Bottom Layer w0.3: v1@144.86,68.217 v1(144.91,68.217) v1(144.91,72.668)
P0_8: 
P0_8: 
P0_8: 
P0_8: 
P0_8: 
P0_8: 
P0_8: 
P0_8: 
P0_8: 
P0_8: 
P0_8: 
P0_8: 
P0_8: R79.1 U13.77 | length 94.6
  Top Layer w0.25: v1(94.998,80.32) 95.248,80.32 95.798,80.87 98.517,80.87 U13.77@101.205,83.559 ; v2(95.248,66.767) 95.848,66.167 101.6,66.167 102.65,67.217 117.304,67.217 122.51,62.01 136.477,62.01 141.584,67.117 v1(145.911,67.117) ; v1(145.674,78.9) 147.005,77.569 148.962,77.569 150.162,78.77 R79.1@150.162,78.843 ; R79.1@150.162,78.85 R79.1@150.174,78.85
  Bottom Layer w0.25: v1(94.998,80.32) 94.648,79.97 94.648,67.367 v2(95.248,66.767) ; v1(145.674,78.9) 145.724,78.85 145.724,76.05 145.924,75.85 v1@145.924,67.117
P0_8_: 
P0_8_: 
P0_8_: 
P0_9: R80.1 U13.76 | length 94.2
  Top Layer w0.25: v2(94.348,65.616) 101.8,65.616 102.85,66.667 117.053,66.667 122.19,61.53 136.676,61.53 141.012,65.866 146.561,65.866 v1(146.811,66.117) ; v2(94.398,81.72) 98.66,81.72 U13.76@100.852,83.913 ; v1(146.774,76.35) R80.1@150.055,76.35
  Bottom Layer w0.25: v2(94.348,65.616) 94.048,65.916 94.048,81.37 v2(94.398,81.72) ; v1(146.774,76.35) 146.824,76.3 v1@146.824,66.117
P0_9_: 
P0_9_: 
P0_9_: 
P0_9_: 
P0_10: U13.48
P0_11: U13.49 U24.4 | length 32.5
  Top Layer w0.25: U13.49@112.165,94.519 113.102,95.456 v1(113.102,96.024) ; v1(135.258,94.724) 135.324,94.724 135.339,94.708 U24.4@135.339,89.425
  Bottom Layer w0.3: v1(113.102,96.024) 113.102,95.724 116.453,92.373 117.504,92.373 117.804,92.673 123.055,92.673 123.505,92.223 124.355,92.223 126.256,94.124 134.658,94.124 v1(135.258,94.724)
P0_13: 
P0_15: U1.5 U4.14 U13.62 U23.6 U24.1 | length 176.8
  Top Layer w0.25: U23.6@95.859,100.9 95.859,99.69 96.248,99.301 v1@96.248,98.95 ; v1(98.149,99.15) 98.424,98.874 98.424,97.47 99.544,96.35 100.082,96.35 U13.62@105.448,90.984 ; v1(130.557,101.926) 130.174,101.543 130.174,94.323 131.529,92.968 U24.1@131.529,89.425
  Top Layer w0.3: v2(93.748,83.571) 94.698,84.521 94.698,85.571 99.599,90.473 99.599,94.377 100.827,95.605 ; v2(93.798,36.359) 105.651,36.359 v2(105.751,36.459) ; v2(105.601,30.758) 106.251,30.107 108.951,30.107 109.327,30.483 U4.14@109.327,31.709 ; v2@105.835,6.717 v2(105.801,6.752) 106.076,7.027 U1.5@108.477,7.027
  Bottom Layer w0.3: v2(93.748,83.571) 93.398,83.221 93.397,36.759 v2(93.798,36.359) ; v1@96.248,98.95 96.448,99.15 98.424,99.15 98.624,98.95 99.599,98.95 100.224,99.575 109.101,99.575 110.002,100.475 115.653,100.475 116.803,101.625 130.257,101.625 v1(130.557,101.926) ; v2(105.601,30.758) 105.651,30.708 v2@106.151,30.708 ; v2(105.751,36.459) 106.151,36.059 106.151,27.981 104.976,26.807 104.976,24.556 106.151,23.382 106.151,7.102 v2(105.801,6.752)
  other v1: 96.124,99.224
P0_16: U13.63
P0_17: U1.4 U4.17 U13.61 U23.2 U24.13 | length 177.5
  Top Layer w0.25: v2(93.598,27.957) 94.098,28.457 102.95,28.457 103.85,27.557 109.852,27.557 111.277,28.982 U4.17@111.277,31.709 ; U23.2@94.589,95.2 94.589,98.766 v1(94.698,98.875) ; v1(99.199,100.15) 99.224,97.624 99.824,97.024 100.114,97.024 U13.61@105.801,91.337 ; U24.13@135.339,98.675 135.339,102.457 v1(135.608,102.726)
  Top Layer w0.3: v2(105,8.002) 105.876,8.002 106.201,7.677 U1.4@108.477,7.677
  Top Layer w0.4: v2(92.597,86.972) 92.597,87.722 94.948,90.073 94.948,93.924 94.589,94.282 U23.2@94.589,95.2 ; v2(105,8.002) v2@105.016,7.987
  Bottom Layer w0.3: 92.197,40.86 92.197,85.822 92.597,86.222 v2(92.597,86.972) ; 92.197,41.01 92.197,29.357 v2(93.598,27.957) ; v1(94.698,98.875) 94.698,99.448 95.674,100.424 96.674,100.424 96.949,100.15 108.751,100.15 109.777,101.175 115.303,101.175 116.403,102.276 128.956,102.276 129.857,103.176 135.158,103.176 v1(135.608,102.726) ; v1@99.175,100.124 99.175,100.126 v1(99.199,100.15) ; v2@104.626,27.557 104.276,27.207 104.276,10.853 105,10.129 v2(105,8.002)
  other v2: 104.526,27.957
P0_18: U1.3 U4.16 U13.60 U23.5 U24.14 | length 169.8
  Top Layer w0.25: v1(100.399,98.125) 100.399,97.446 U13.60@106.155,91.691
  Top Layer w0.3: v2(93.297,85.071) 98.999,90.773 98.999,95.724 97.129,97.593 U23.5@97.129,100.9 ; v2(94.898,29.407) 110.252,29.407 110.627,29.782 U4.16@110.627,31.709 ; v1@97.124,98.225 v1@97.129,98.23 ; v2@103.405,9.257 v2(103.35,9.202) 105.576,9.202 106.451,8.327 U1.3@108.477,8.327 ; U24.14@134.058,98.675 v1@134.058,100.975
  Bottom Layer w0.3: 92.797,84.571 v2(93.297,85.071) ; 92.797,84.571 92.797,30.157 93.548,29.407 v2(94.898,29.407) ; v1@97.124,98.225 97.224,98.125 102.25,98.125 102.5,98.375 109.301,98.375 110.702,99.775 115.953,99.775 117.153,100.975 129.757,100.975 130.307,100.425 133.708,100.425 v1(134.058,100.775) ; v2(103.3,29.457) 103.35,29.407 v2(103.35,9.202)
  other v1: 97.149,98.2
P0_19: U13.59
P0_19: 
P0_20: U13.58 U23.1 | length 18.1
  Top Layer w0.25: U23.1@93.319,95.2 93.319,96.996 v1(93.347,97.024) ; v1(102.3,97.124) 102.3,96.501 105.451,93.35 105.91,93.35 U13.58@106.862,92.398
  Bottom Layer w0.25: v1(93.347,97.024) 93.398,97.074 96.098,97.074 96.548,96.624 101.8,96.624 v1(102.3,97.124)
P0_21: U13.57
P0_23: U6.3 U13.9 | length 85
  Top Layer w0.25: U13.9@114.64,78.256 119.03,73.866 119.315,73.866 121.583,71.598 122.727,71.598 125.224,69.1 125.224,67.7 125.874,67.05 127.274,67.05 128.174,66.15 132.674,66.15 133.224,66.7 v1@134.274,66.7
  Top Layer w0.4: v1(135.574,21.9) 142.06,21.9 143.46,23.3 143.46,24.756 144.842,26.138 U6.3@145.804,26.138
  Bottom Layer w0.4: v1@134.024,66.95 v1(134.074,66.95) 134.074,66.4 134.974,65.5 134.974,58.781 134.558,58.365 134.558,57.214 134.974,56.798 134.974,53.629 134.528,53.183 134.528,51.843 134.974,51.396 134.974,45.65 135.424,45.2 135.424,22.05 v1(135.574,21.9)
P0_24: U10.3 U13.8 | length 55.7
  Top Layer w0.25: U13.8@114.287,77.902 118.212,73.977 ; 118.204,73.969 118.737,73.436 119.137,73.436 121.405,71.168 122.407,71.168 124.724,68.85 124.724,67.5 125.674,66.55 127.024,66.55 127.974,65.6 133.024,65.6 133.424,66 134.274,66 134.424,65.85 135.474,65.85 v1@135.974,66.35 ; v1(142.91,55.814) 142.929,55.795 U10.3@145.849,55.795
  Top Layer w0.3: v1(136.058,52.563) 136.458,52.163 142.324,52.163 v1(142.874,52.713)
  Bottom Layer w0.4: v1@135.974,66.35 136.074,66.25 136.074,59.049 136.808,58.315 136.808,57.314 136.074,56.58 v1@136.074,52.563 ; v1(142.874,52.713) 142.874,55.778 v1(142.91,55.814)
  other v1: 136.074,66.7
P0_25: 
P0_25: 
P0_25: 
P0_25: 
P0_25: 
P0_25: 
P0_25: 
P0_25: 
P0_25: 
P0_25: 
P0_25: C28.1 R40.1 R41.1 U13.7 | length 112.3
  Top Layer w0.25: U13.7@113.933,77.549 118.008,73.474 118.476,73.006 118.819,73.006 121.128,70.697 122.234,70.697 122.283,70.648 124.185,68.745 124.185,68.689 124.274,68.6 124.274,67.3 125.474,66.1 126.774,66.1 127.874,65 v1(133.924,65)
  Top Layer w0.4: v1(134.824,17.75) v1(148.124,17.75) ; v1(148.124,28.5) 153.72,28.5 154.975,27.245 155.163,27.057 v1(156.663,27.057) 158.549,27.057 R41.1@158.562,27.043
  Bottom Layer w0.3: 153.672,27.053 C28.1@154.772,27.053
  Bottom Layer w0.4: v1@133.924,64.95 134.274,64.6 134.274,58.901 133.978,58.605 133.978,56.974 134.274,56.678 134.274,53.749 133.948,53.423 133.948,51.423 134.274,51.096 134.274,45.2 134.724,44.75 134.724,22.65 134.574,22.5 134.574,20.8 134.824,20.55 v1(134.824,17.75) ; v1(148.124,17.75) v1(148.124,28.5) ; C28.1@154.772,27.053 156.66,27.053 v1(156.663,27.057)
P0_27: 
P0_27: 
P0_27: 
P0_27: 
P0_27: 
P0_27: 
P0_27: 
P0_27: 
P0_27: 
P0_27: 
P0_27: 
P0_27: 
P0_27: D11.2 R71.1 U13.25 | length 125.1
  Top Layer w0.25: U13.25@120.297,83.913 120.346,83.913 124.806,88.372 124.806,88.421 125.704,88.421 v1(126.605,89.321) ; v1(147.711,78.92) 149.112,80.32 153.163,80.32 ; v1(147.724,31.6) 153.971,31.6 154.763,30.808 154.763,30.257 154.82,30.2 154.877,30.143 R71.1@158.562,30.143 158.564,30.145 R71.1@158.564,30.157 ; 153.163,80.3 158.974,80.3 160.563,81.889 160.563,83.12 ; D11.2@154.324,30.05 D11.2@154.779,30.05 ; v1(159.924,86.55) 159.924,85.211 160.664,84.471 160.664,83.221 160.563,83.12 ; 160.563,83.17 160.563,83.12
  Bottom Layer w0.3: v1(126.605,89.321) 127.753,89.321 130.924,86.15 131.757,86.15 ; 131.774,86.15 131.757,86.15 ; v1(147.711,78.92) 149.024,77.607 149.024,65.7 149.574,65.15 149.574,51.126 147.311,48.862 147.311,32.013 v1(147.724,31.6) ; v1(159.924,86.55) 152.634,86.55 151.312,87.872 133.479,87.872 131.757,86.15
P0_28: R10.1 U6.11 U10.11 U13.24 | length 77.5
  Top Layer w0.25: v1(135.724,57.764) 136.758,57.764 137.859,58.865 138.709,58.865 139.459,59.615 U10.11@139.959,59.615 ; R10.1@135.784,34.708 135.758,33.508 v1(136.558,32.708) 139.319,29.948 U6.11@139.954,29.948
  Top Layer w0.3: U13.24@119.944,83.559 120.553,82.95 122.924,82.95 v1(123.524,83.55) ; v1(125.824,79.15) 128.924,76.05 ; 128.906,76.069 134.506,76.069 ; 134.524,76.05 v1(134.924,76.45)
  Bottom Layer w0.3: v1(123.524,83.55) 124.324,83.55 124.724,83.15 124.724,80.85 125.824,79.75 v1(125.824,79.15) ; v1(134.924,76.45) 134.274,75.8 134.274,70.15 135.024,69.4 135.024,66.2 135.524,65.7 135.524,53.43 135.058,52.963 135.058,52.213 135.524,51.747 135.524,46.45 136.174,45.8 v1@136.174,32.708
P0_29: R72.1 U13.29 | length 71.2
  Top Layer w0.25: U13.29@119.237,87.448 121.438,89.65 124.074,89.65 v1(124.374,89.95)
  Top Layer w0.4: v1(169.324,87.65) 169.324,100.1 170.617,101.393 170.617,103.726 R72.1@170.617,103.75
  Bottom Layer w0.3: v1(124.374,89.95) 124.633,89.95 126.805,92.122 127.855,92.122 128.155,91.822 128.155,90.619 128.992,89.783 129.524,89.25 141.074,89.25 141.774,88.55 151.574,88.55 152.474,87.65 v1(169.324,87.65)
P0_30: JP6.12 U13.30 | length 43.6
  Top Layer w0.3: U13.30@118.883,87.802 121.281,90.2 123.232,90.2 123.904,90.872 125.554,90.872 127.255,92.572 127.255,98.074 126.874,98.454 126.874,101.3 129.224,103.65 133.474,103.65 135.524,105.7 135.524,107.25 135.174,107.6 125.114,107.6 JP6.12@123.874,108.84
P1_0: U3.3 U13.95 | length 76.5
  Top Layer w0.25: v1(95.425,48.998) 96.313,49.885 108.733,49.885 109.651,48.968 110.857,48.968 111.775,49.885 119.302,49.885 119.852,49.335 120.602,49.335 v1(121.602,50.335) ; v1@101.199,71.768 101.682,72.25 102.624,72.25 U13.95@107.569,77.195
  Bottom Layer w0.3: 95.425,48.435 95.948,47.912 97.198,47.912 97.799,48.512 97.799,49.462 97.449,49.812 97.449,50.613 95.748,52.313 95.748,61.565 97.749,63.566 97.749,64.416 101.199,67.867 101.199,71.718 v1(101.149,71.768) ; U3.3@114.403,55.508 119.252,50.659 119.252,49.885 119.752,49.385 120.802,49.385 121.602,50.185 v1(121.602,50.335)
P1_1: U3.4 U13.94 | length 78.8
  Top Layer w0.25: v1(96.825,48.948) 97.313,49.435 108.575,49.435 109.472,48.538 111.035,48.538 111.933,49.435 119.102,49.435 119.702,48.835 121.502,48.835 v1(122.952,50.285) ; v1(99.199,73.068) 99.517,72.75 102.452,72.75 U13.94@107.216,77.513
  Bottom Layer w0.3: v1@97.025,49.148 v1(96.825,48.948) 96.825,50.436 95.148,52.113 95.148,61.865 97.148,63.866 97.148,64.666 100.649,68.167 100.649,70.818 99.199,72.268 v1(99.199,73.068) ; U3.4@114.05,55.154 118.702,50.502 118.702,49.635 119.502,48.835 121.802,48.835 122.952,49.985 v1(122.952,50.285)
P1_4: U3.2 U13.93 | length 71.4
  Top Layer w0.25: v1@95.425,50.348 108.378,50.341 ; v1(99.049,74.469) 100.268,73.25 102.21,73.25 U13.93@106.862,77.902 ; 108.378,50.348 108.878,50.348 109.829,49.398 110.679,49.398 111.629,50.348 112.029,50.348 ; 112.029,50.34 v1(120.252,50.335)
  Bottom Layer w0.3: v1(95.425,50.448) 94.598,51.275 94.598,62.166 96.598,64.166 96.598,64.866 100.049,68.317 100.049,70.568 98.249,72.368 98.249,73.668 v1(99.049,74.469) ; U3.2@114.757,55.861 120.252,50.366 v1(120.252,50.335)
P1_8: U3.40 U13.92 | length 36.8
  Top Layer w0.25: v1(101.374,74.15) 102.403,74.15 U13.92@106.509,78.256 ; v1(102.45,64.966) 102.8,64.616 104.15,64.616 105.15,65.616 106.07,65.616 106.251,65.435 v1@114.653,65.435
  Bottom Layer w0.25: v1(101.374,74.15) 103.018,74.15 103.5,73.668 103.5,72.518 103.85,72.168 103.85,67.467 102.45,66.067 v1(102.45,64.966) ; U3.40@112.282,61.059 114.653,63.43 v1@114.653,65.435
  other v1: 114.853,65.216
P1_9: U3.43 U13.91 | length 39.7
  Top Layer w0.25: v1(102.174,75.2) 102.746,75.2 U13.91@106.155,78.609 ; v1@104.95,71.918 105.868,71 117.871,71 120.454,68.417 v2(121.155,68.417)
  Bottom Layer w0.25: v1(102.174,75.2) 103.219,75.2 104.05,74.369 104.05,72.818 v1@104.95,71.918 ; U3.43@113.343,59.998 113.422,60.078 121.155,67.81 v2(121.155,68.417)
  other v1: 104.95,71.968
P1_10: U3.44 U13.90 | length 43.4
  Top Layer w0.25: v1(101.374,76.25) 101.474,76.35 103.189,76.35 U13.90@105.801,78.963 ; v1@105,73.318 106.819,71.5 118.174,71.5 120.307,69.367 121.655,69.367 122.174,68.848 v1(122.174,67.3)
  Bottom Layer w0.25: U3.44@113.817,59.766 121.352,67.3 v1(122.174,67.3)
  Bottom Layer w0.3: v1(101.374,76.25) 103.469,76.25 105,74.719 v1@105,73.318 ; U3.44@113.696,59.644 U3.44@113.817,59.766
  other v1: 104.95,73.268
P1_14: U3.41 U13.89 | length 35.1
  Top Layer w0.25: v1(102.174,77.35) 103.482,77.35 U13.89@105.448,79.316 ; v1(105.551,64.566) 105.851,64.866 113.853,64.866 114.453,64.266 115.653,64.266 v1@115.903,64.516
  Bottom Layer w0.25: U3.41@112.635,60.705 115.903,63.973 v1@115.903,64.516
  Bottom Layer w0.3: v1(102.174,77.35) 103.169,77.35 105.874,74.645 105.874,64.89 v1(105.551,64.566)
  other v1: 116.003,64.516
P1_15: U3.34 U12.3 U13.88 | length 67.1
  Top Layer w0.25: U12.3@94.474,40.259 94.498,40.236 v1(94.498,38.26) ; v1(95.598,64.566) 96.148,65.116 101.049,65.116 102.08,64.086 104.48,64.086 105.251,63.316 107.001,63.316 v1(107.451,63.766) ; v1(98.099,75.419) 98.793,75.419 101.624,78.25 103.674,78.25 U13.88@105.094,79.67
  Bottom Layer w0.25: v1(94.498,38.26) 93.998,38.76 93.998,62.966 v1(95.598,64.566) 99.499,68.467 99.499,70.368 97.699,72.168 97.699,75.019 v1(98.099,75.419) ; v1(107.451,63.766) 107.451,62.46 U3.34@108.499,61.412
P1_16: U3.31 U13.87 | length 24.2
  Top Layer w0.25: v1(102.174,79.15) 102.424,78.9 103.617,78.9 U13.87@104.741,80.023
  Bottom Layer w0.3: v1(102.174,79.15) 106.474,74.85 106.474,61.292 U3.31@107.501,60.265
P1_17: U3.30 U13.86 | length 29
  Top Layer w0.25: v1(100.724,78.85) 100.724,79.2 101.774,80.25 102.624,80.25 103.324,79.55 103.56,79.55 U13.86@104.387,80.377 ; v1(102.95,70.118) v1(104.75,70.118)
  Bottom Layer w0.25: v1@104.95,69.917 105.251,69.617 105.251,65.716 104.6,65.066 104.6,64.216 105.901,62.916 105.901,61.182 U3.30@107.085,59.998
  Bottom Layer w0.3: v1(100.724,78.85) 100.424,78.55 100.424,73.643 101.099,72.968 102.05,72.968 103.35,71.668 103.35,70.518 v1(102.95,70.118)
P1_18: JP6.5 U13.32 | length 21.8
  Top Layer w0.3: JP6.5@116.254,106.3 116.254,104.17 122.024,98.4 122.024,92.357 U13.32@118.176,88.509
P1_19: JP6.7 U13.33 | length 27
  Top Layer w0.3: U13.33@117.822,88.862 121.374,92.414 121.374,98.1 115.024,104.45 115.024,107.3 115.374,107.65 117.444,107.65 JP6.7@118.794,106.3
P1_20: JP6.9 U13.34 | length 25.5
  Top Layer w0.3: U13.34@117.469,89.216 120.724,92.472 120.724,97.75 118.474,100 v1@117.924,100 ; JP6.9@121.334,106.3 121.334,100.74 122.349,99.725 v1@122.374,99.7
  Bottom Layer w0.3: v1@117.924,100 118.224,100.3 121.774,100.3 122.349,99.725 v1@122.374,99.7
  other v1: 117.724,100 122.624,100
P1_21: 
P1_21: JP6.11 U13.35 | length 25.7
  Top Layer w0.25: v1@118.324,98.75 118.874,98.75 119.174,98.45
  Top Layer w0.3: U13.35@117.115,89.569 120.124,92.579 120.124,97.5 119.174,98.45 ; v1@123.574,98.85 123.574,98.95 123.574,100.35 121.974,101.95 121.974,104.4 JP6.11@123.874,106.3
  Bottom Layer w0.3: v1@118.324,98.75 118.349,98.775 118.574,99 123.424,99 123.499,98.925 v1@123.524,98.9
  other v1: 118.324,98.8 123.524,98.95
P1_22: JP6.13 U13.36 | length 27.2
  Top Layer w0.25: v1@118.024,96.6 118.924,96.6 119.474,96.05 119.474,92.636 ; v1(123.524,96.55) 124.024,96.55 124.474,97 124.474,97.95
  Top Layer w0.3: U13.36@116.762,89.923 119.474,92.636 ; 124.474,97.95 124.474,100.35 122.974,101.85 122.974,103.2 126.074,106.3 JP6.13@126.414,106.3
  Bottom Layer w0.3: v1@118.024,96.55 v1(123.524,96.55) v1@123.574,96.6
  other v1: 117.752,96.423
P1_22: 
P1_22: 
P1_22: 
P1_22: 
P1_22: 
P1_22: 
P1_22: 